# EAGLE board test02 (EAGLE 6.3)

Size 54.95 x 74.11 mm. Coordinates in mm from the lower left corner, seen from the top.
Outline: 0,74.11 54.95,74.11 54.95,0 0,0 0,74.11
Copper layers (1*16): Top 0.035mm / dielectric 1.5mm / Bottom 0.035mm
Design rules "default": minimum track width 10mil, minimum drill 24mil, track to track 8mil, track to pad 8mil, pad to pad 8mil, via to via 8mil, smd to smd 8mil, copper to edge 40mil, drill to drill 8mil, minimum pad ring 10mil, minimum via ring 8mil, stop-mask expansion 4mil, vias tented up to drill 0mil, thermal gap 10mil

## Footprints (pad centres in the part's own frame; a part is rotated, then mirrored left to right if it is on the bottom)
BANANA_CONN = drill 3.81 pad 5.461: P$1 0,0
SJ_3 = smd 0.635 x 1.27: 1 -0.889,0; 2 0,0; 3 0.889,0
0603-CAP = smd 1.1 x 1: 1 -0.85,0; 2 0.85,0
EIA3528 = smd 1.2 x 2.5: A 1.65,0; C -1.65,0
1X20 = drill 1.016 pad 1.88 square: 1 0,0 | drill 1.016 pad 1.88: 2 2.54,0; 3 5.08,0; 4 7.62,0; 5 10.16,0; 6 12.7,0; 7 15.24,0; 8 17.78,0; 9 20.32,0; 10 22.86,0; 11 25.4,0; 12 27.94,0; 13 30.48,0; 14 33.02,0; 15 35.56,0; 16 38.1,0; 17 40.64,0; 18 43.18,0; 19 45.72,0; 20 48.26,0
1X05 = drill 1.016 pad 1.88: 1 0,0; 2 2.54,0; 3 5.08,0; 4 7.62,0; 5 10.16,0
1X04 = drill 1.016 pad 1.88 square: 1 0,0 | drill 1.016 pad 1.88: 2 2.54,0; 3 5.08,0; 4 7.62,0
QFN-88 = smd 0.55 x 0.23: 1 -5.8,5.25; 2 -5.8,4.75; 3 -5.8,4.25; 4 -5.8,3.75; 5 -5.8,3.25; 6 -5.8,2.75; 7 -5.8,2.25; 8 -5.8,1.75; 9 -5.8,1.25; 10 -5.8,0.75; 11 -5.8,0.25; 12 -5.8,-0.25; 13 -5.8,-0.75; 14 -5.8,-1.25; 15 -5.8,-1.75; 16 -5.8,-2.25; 17 -5.8,-2.75; 18 -5.8,-3.25; 19 -5.8,-3.75; 20 -5.8,-4.25; 21 -5.8,-4.75; 22 -5.8,-5.25; 45 5.8,-5.25; 46 5.8,-4.75; 47 5.8,-4.25; 48 5.8,-3.75; 49 5.8,-3.25; 50 5.8,-2.75; 51 5.8,-2.25; 52 5.8,-1.75; 53 5.8,-1.25; 54 5.8,-0.75; 55 5.8,-0.25; 56 5.8,0.25; 57 5.8,0.75; 58 5.8,1.25; 59 5.8,1.75; 60 5.8,2.25; 61 5.8,2.75; 62 5.8,3.25; 63 5.8,3.75; 64 5.8,4.25; 65 5.8,4.75; 66 5.8,5.25 | smd 0.23 x 0.55: 23 -5.25,-5.7; 24 -4.75,-5.7; 25 -4.25,-5.7; 26 -3.75,-5.7; 27 -3.25,-5.7; 28 -2.75,-5.7; 29 -2.25,-5.7; 30 -1.75,-5.7; 31 -1.25,-5.7; 32 -0.75,-5.7; 33 -0.25,-5.7; 34 0.25,-5.7; 35 0.75,-5.7; 36 1.25,-5.7; 37 1.75,-5.7; 38 2.25,-5.7; 39 2.75,-5.7; 40 3.25,-5.7; 41 3.75,-5.7; 42 4.25,-5.7; 43 4.75,-5.7; 44 5.25,-5.7; 67 5.25,5.7; 68 4.75,5.7; 69 4.25,5.7; 70 3.75,5.7; 71 3.25,5.7; 72 2.75,5.7; 73 2.25,5.7; 74 1.75,5.7; 75 1.25,5.7; 76 0.75,5.7; 77 0.25,5.7; 78 -0.25,5.7; 79 -0.75,5.7; 80 -1.25,5.7; 81 -1.75,5.7; 82 -2.25,5.7; 83 -2.75,5.7; 84 -3.25,5.7; 85 -3.75,5.7; 86 -4.25,5.7; 87 -4.75,5.7; 88 -5.25,5.7 | smd 5.588 x 5.588: PAD 0,0

## Placement (x,y rotation side)
1.25V  [BANANA_CONN]  16.71,61.19 0 top
3.3V  [BANANA_CONN]  39.57,61.19 0 top
BOOT_0  [SJ_3]  38.3,52.8 180 top
BOOT_1  [SJ_3]  34.49,52.8 180 top
C1  10uF  [0603-CAP]  22.23,26.21 270 bottom
C2  10uF  [0603-CAP]  24.43,26.21 270 bottom
C3  .1uF  [0603-CAP]  24.03,35.81 90 bottom
C4  .1uF  [0603-CAP]  26.63,26.21 270 bottom
C5  10uF  [0603-CAP]  32.73,32.31 180 bottom
C6  .1uF  [0603-CAP]  30.63,28.51 270 bottom
C7  47uF  [EIA3528]  21.15,56.74 135 bottom
C8  47uF  [EIA3528]  12.9,56.74 45 bottom
CLOCK_0  [SJ_3]  30.68,52.8 180 top
CLOCK_1  [SJ_3]  42.11,52.8 180 top
J3  [BANANA_CONN]  26.87,11.66 0 top
JP2  M20  [1X20]  1.47,6.58 90 top
JP3  [1X05]  53.54,67.54 270 top
JP4  M20  [1X20]  53.54,6.58 90 top
JP5  [1X04]  33.22,67.54 0 top
JP6  [1X04]  17.98,67.54 180 top
JP7  [1X05]  1.47,57.38 90 top
U$1  ADSP-21479  [QFN-88]  26.87,31.98 270 top

## Library data of the parts
1.25V 3.3V J3 JP2-JP7 = SparkFun-Connectors
BOOT_0 BOOT_1 C1-C6 CLOCK_0 CLOCK_1 = 1x05smd
C7 C8 = SparkFun-Capacitors
U$1 = Strutz Electronic Industries

## Nets
BOOT_CFG0: BOOT_0.2 U$1.2
BOOT_CFG1: BOOT_1.2 U$1.5
CLK_CFG0: CLOCK_0.2 U$1.7
CLK_CFG1: CLOCK_1.2 U$1.1
CLKIN: JP3.5 U$1.9
DAI_P01: JP2.9 U$1.37
DAI_P02: JP2.8 U$1.38
DAI_P03: JP2.13 U$1.31
DAI_P04: JP2.1 U$1.51
DAI_P05: JP2.6 U$1.43
DAI_P06: JP2.7 U$1.42
DAI_P07: JP2.11 U$1.35
DAI_P08: JP2.2 U$1.50
DAI_P09: JP2.5 U$1.44
DAI_P10: JP2.4 U$1.45
DAI_P11: JP4.7 U$1.58
DAI_P12: JP4.6 U$1.57
DAI_P13: JP2.12 U$1.34
DAI_P14: JP4.1 U$1.52
DAI_P15: JP4.5 U$1.56
DAI_P16: JP4.4 U$1.55
DAI_P17: JP4.3 U$1.54
DAI_P18: JP4.2 U$1.53
DAI_P19: JP2.10 U$1.36
DAI_P20: JP2.3 U$1.48
DPI_P01: JP3.2 U$1.16
DPI_P02: JP3.1 U$1.17
DPI_P03: JP7.5 U$1.18
DPI_P04: JP7.3 U$1.21
DPI_P05: JP7.4 U$1.20
DPI_P06: JP7.2 U$1.22
DPI_P07: JP2.20 U$1.25
DPI_P08: JP7.1 U$1.24
DPI_P09: JP2.19 U$1.26
DPI_P10: JP2.18 U$1.27
DPI_P11: JP2.17 U$1.28
DPI_P12: JP2.16 U$1.29
DPI_P13: JP2.15 U$1.30
DPI_P14: JP2.14 U$1.32
FLAG0: JP4.10 U$1.68
FLAG1: JP4.11 U$1.70
FLAG2: JP4.12 U$1.71
FLAG3: JP4.13 U$1.72
GND: BOOT_0.1 BOOT_1.1 C1.1 C2.1 C3.1 C4.1 C5.1 C6.1 C7.C C8.C CLOCK_0.1 CLOCK_1.1 J3.P$1 U$1.6 U$1.60 U$1.73 U$1.74 U$1.76 U$1.PAD
TCK: JP4.18 U$1.84
TDI: JP4.17 U$1.83
TDO: JP4.16 U$1.80
THD_b51ad: JP4.9 U$1.62
THD_M: JP4.8 U$1.61
TMS: JP4.20 U$1.87
VDD_EXT+THD: 3.3V.P$1 BOOT_0.3 BOOT_1.3 C1.2 C2.2 C3.2 C4.2 C7.A CLOCK_0.3 CLOCK_1.3 JP5.1 JP5.2 JP5.3 JP5.4 U$1.3 U$1.11 U$1.23 U$1.40 U$1.47 U$1.63 U$1.75 U$1.81
VDD_INT: 1.25V.P$1 C5.2 C6.2 C8.A JP6.1 JP6.2 JP6.3 JP6.4 U$1.4 U$1.8 U$1.12 U$1.13 U$1.15 U$1.19 U$1.33 U$1.39 U$1.41 U$1.46 U$1.49 U$1.59 U$1.64 U$1.65 U$1.66 U$1.67 U$1.69 U$1.77 U$1.82 U$1.85 U$1.88
XTAL: JP3.4 U$1.10
~EMU: JP4.15 U$1.79
~RESET: JP4.19 U$1.86
~RESETOUT/~RUNRSTIN: JP3.3 U$1.14
~TRST: JP4.14 U$1.78